# Altium PCB PCB_Quectel_M25.PcbDoc (part 1 of 2)
Units mm, origin at the board's own origin, x right, y up, seen from the top; angles counter-clockwise.
Board outline 88.9 x 63.5 mm, 2 copper layers (Top Layer, Bottom Layer), stack 1.67 mm thick; 94 components, 52 nets, 369 pads, 65 vias.
Unrouted connection lines stored in the file: 1.
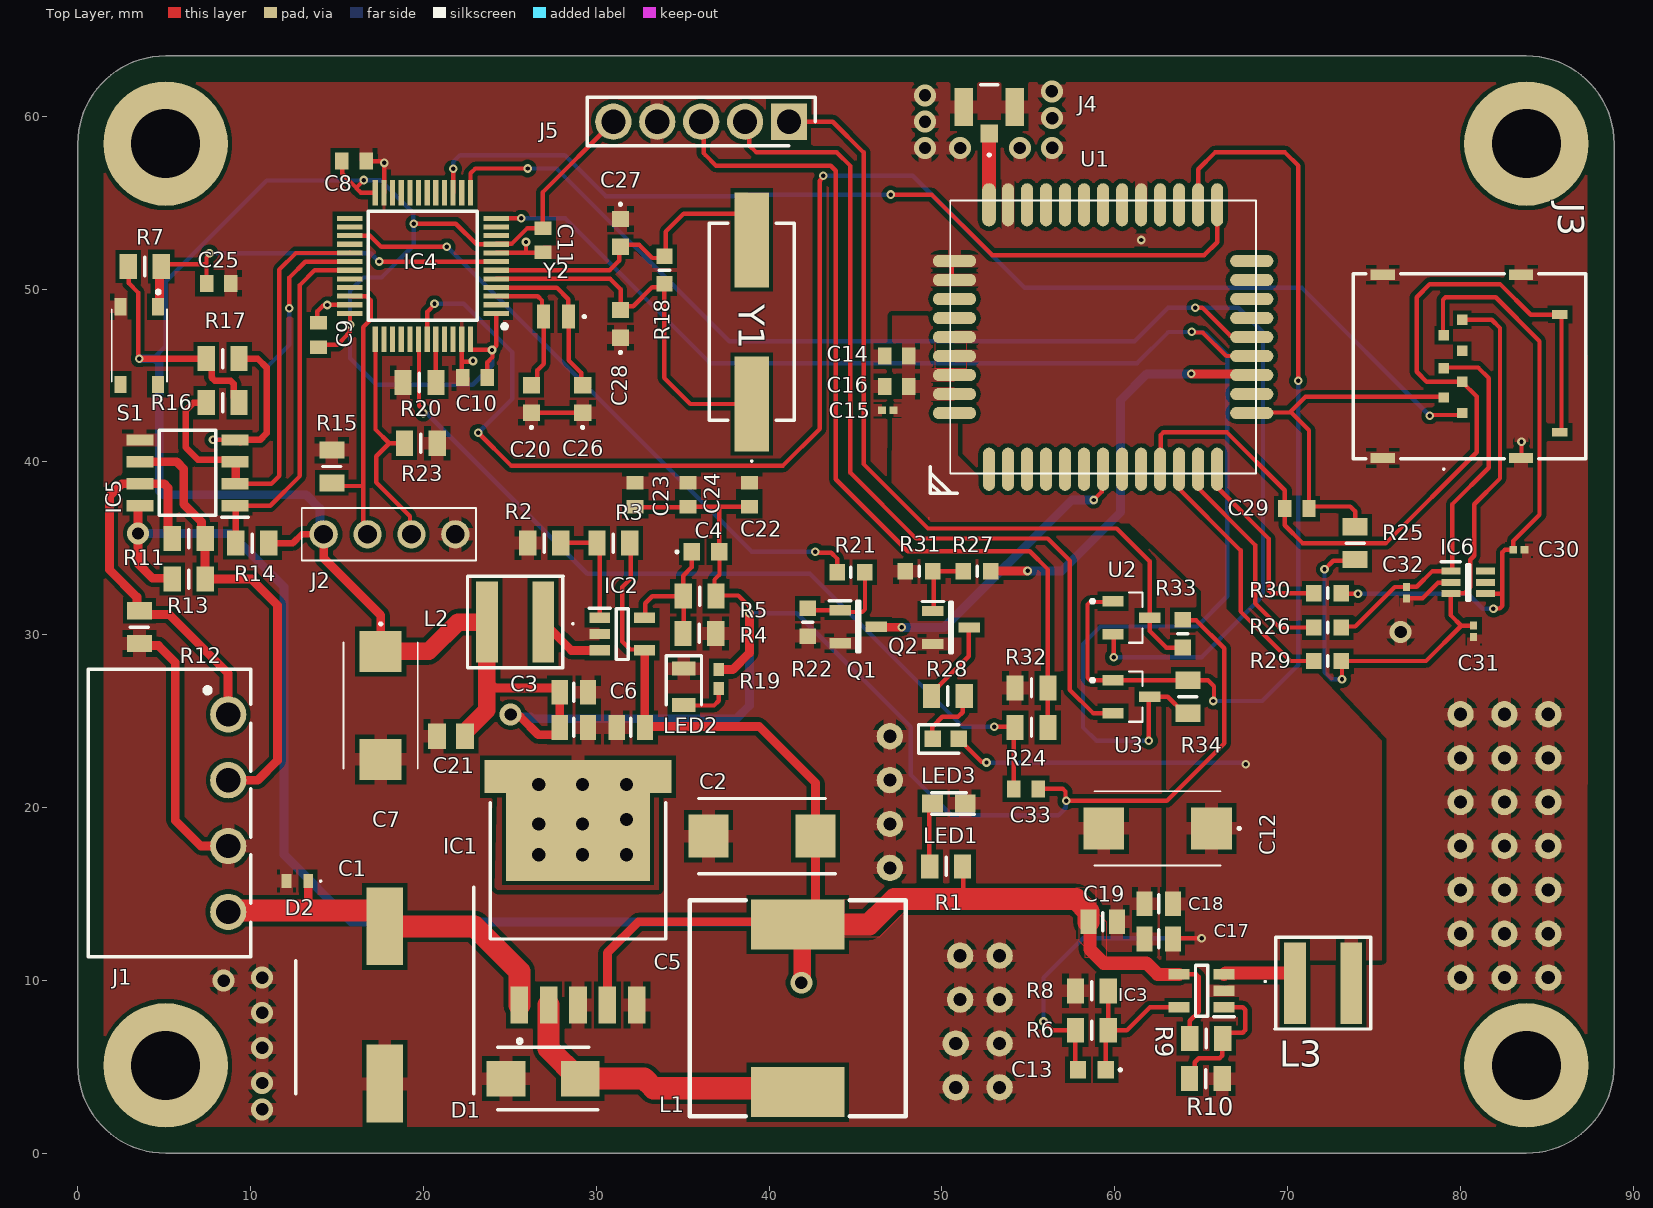
[diagram p0: Top Layer view]
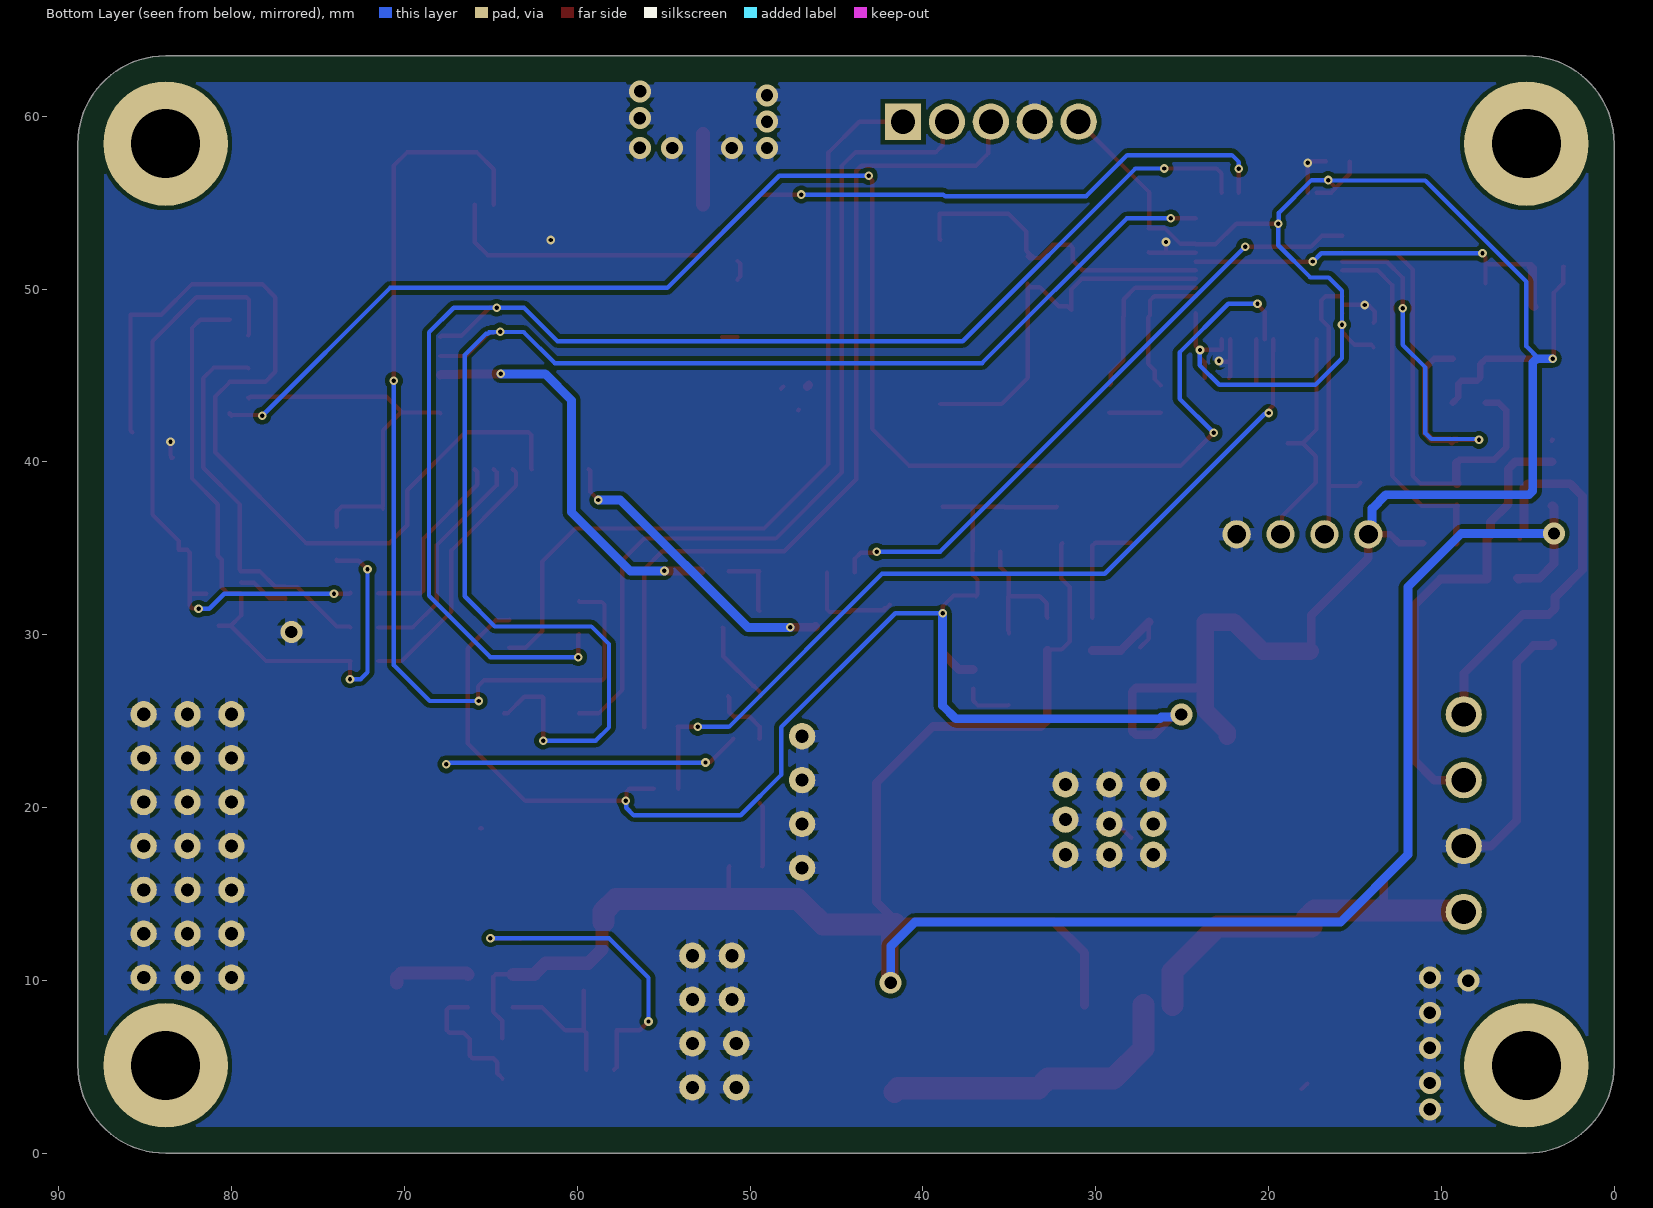
[diagram p1: Bottom Layer view, seen from below]
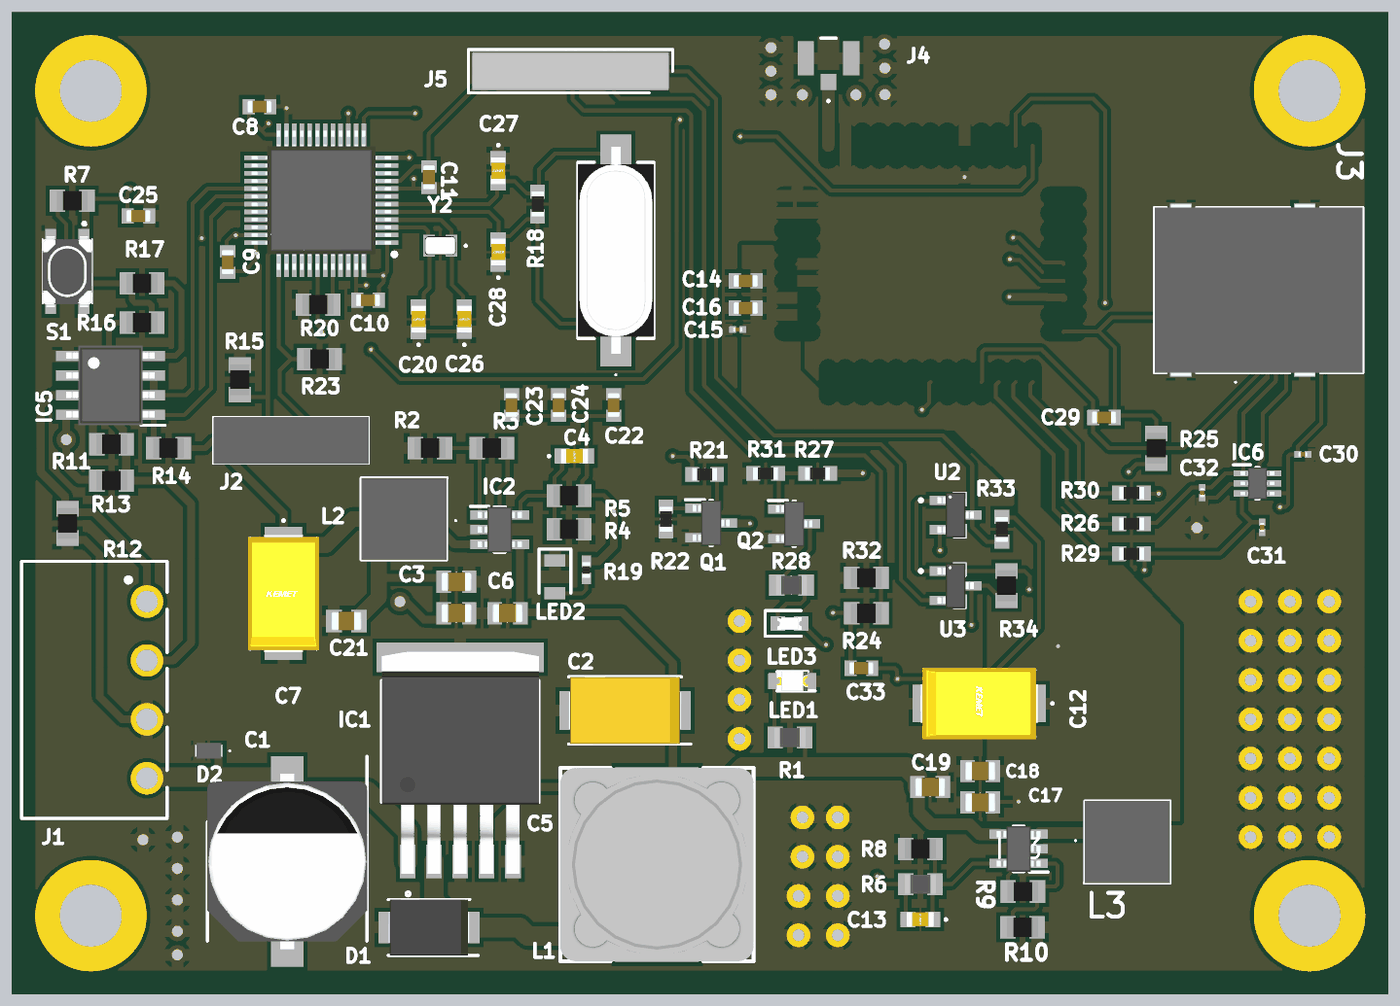
[diagram p2: 3D render of the assembled board from above, using the file's embedded part models]

## Layer stack, top to bottom
Top Solder: solder mask 0.0102, Solder Resist, Dk 3.5
Top Layer: signal copper 0.035
Dielectric 1: dielectric 1.6, FR-4, Dk 4
Bottom Layer: signal copper 0.035
Bottom Solder: solder mask 0.0102, Solder Resist, Dk 3.5

## Board outline
0,5.08 ccw(c5.08,5.08) 5.08,0 83.82,0 ccw(c83.82,5.08) 88.9,5.08 88.9,58.42 ccw(c83.82,58.42) 83.82,63.5 5.08,63.5 ccw(c5.08,58.42) 0,58.42

## Design rules (kind name [scope] priority, off if disabled: settings)
Clearance Clearance_1 [All] p1: gap=0.254 ignorepadtopadclearanceinfootprint=FALSE except(0: Arc-Hole Track-Hole SMDPad-Hole THPad-Hole Via-Hole Fill-Hole Poly-Hole Region-Hole Text-Hole)
Clearance [All] p2: gap=0.254 ignorepadtopadclearanceinfootprint=FALSE except(0: Arc-Hole Track-Hole SMDPad-Hole THPad-Hole Via-Hole Fill-Hole Poly-Hole Region-Hole Text-Hole)
PolygonConnect [All] p1: connectstyle=Relief reliefconductorwidth=0.762 reliefentries=4 polygonreliefangle="90 Angle" airgapwidth=0.254
RoutingVias RoutingVias_1 [IsVia] p1: holewidth=0.2 width=0.5 viastyle="Through Hole" minholewidth=0.254 minwidth=0.5 maxholewidth=0.762 maxwidth=1.27
RoutingVias [IsVia] p2 off: holewidth=0.381 width=0.635 viastyle="Through Hole" minholewidth=0.254 minwidth=0.254 maxholewidth=0.762 maxwidth=1.524
SolderMaskExpansion SolderMaskExpansion_1 [IsVia] p1: expansion=0.102 istentingtop=TRUE
SolderMaskExpansion [IsVia] p2: expansion=0.102 istentingtop=TRUE
Width [All] p1: maxlimit=5.08 minlimit=0.254 preferedwidth=0.254
30 further rules are at their usual default settings.

## Classes and differential pairs
component class Sheet2: R33 R34 U2 U3
component class Sheet3: C29 C30 C31 C32 IC6 J3 J4 LED3 Q1 Q2 R21 R22 R25 R26 R27 R28 R29 R30 R31 U1
component class Sheet1: C20 C26 C27 C28 C33 IC4 IC5 J2 J5 R11 R12 R13 R14 R15 R16 R17 R18 R20 R23 R24 R32 Y2
component class Schematic: C1 C2 C3 C4 C5 C6 C7 C8 C9 C10 C11 C12 C13 C14 C15 C16 C17 C18 C19 C21 C22 C23 C24 C25 D1 D2 IC1 IC2 IC3 J1 L1 L2 L3 LED1 LED2 R1 R2 R3 R4 R5 R6 R7 R8 R9 R10 R19 S1

## Components (designator, comment, footprint, x,y, rotation, side; value= is the part's Value field where it differs from the comment)
C1 "B40900B5477M000" CAPAE1030X1280N 17.767,8.578 r270 top
C2 "220uf" CAPPM7344X310N 39.592,18.35 r180 top
C3 "22uf" CAPC2012X140N 28.702,26.67 r180 top
C4 "47pF" C0603 36.322,34.798 r0 top
C5 "22uf" CAPC2012X140N 28.702,24.638 r180 top
C6 "22uf" CAPC2012X140N 32.004,24.638 r0 top
C7 "470uf" T495D 17.526,25.908 r270 top
C8 "100nf" CAPC1608X90N 15.977,57.404 r180 top
C9 "100nf" CAPC1608X90N 13.924,47.344 r270 top
C10 "100nf" CAPC1608X90N 22.987,44.882 r0 top
C11 "100nf" CAPC1608X90N 26.924,52.832 r90 top
C12 "470uf" T495D 62.484,18.796 r180 top
C13 "47pF" C0603 58.674,4.826 r180 top
C14 "100nf" CAPC1608X90N 47.387,46.129 r0 top
C15 "33pF" CAPC0603X33N 46.876,42.986 r0 top
C16 "10pF" CAPC1608X90N 47.387,44.368 r0 top
C17 "22uf" CAPC2012X140N 62.546,12.4 r0 top
C18 "22uf" CAPC2012X140N 62.546,14.432 r0 top
C19 "22uf" CAPC2012X140N 59.305,13.387 r180 top
C20 "20pF" C0603 26.247,43.649 r90 top
C21 "4.7uf" CAPC2012X152N 21.59,24.13 r0 top
C22 "100nf" CAPC1608X90N 38.862,38.1 r270 top
C23 "100nf" CAPC1608X90N 32.251,38.1 r270 top
C24 "1uF" CAPC1608X90N 35.306,38.1 r270 top
C25 "1uF" CAPC1608X90N 8.147,50.33 r180 top
C26 "20pF" C0603 31.401,47.991 r90 top
C27 "20pF" C0603 31.401,53.26 r270 top
C28 "20pF" C0603 29.21,43.65 r90 top
C29 "100nF" CAPC1608X90N 70.541,37.302 r0 top
C30 "33pF" CAPC0603X33N 83.389,34.912 r180 top
C31 "33pF" CAPC0603X33N 80.762,30.193 r90 top
C32 "33pF" CAPC0603X33N 76.886,32.436 r90 top
C33 "100nF" CAPC1608X90N 54.864,21.082 r0 top
D1 "SS54B" DIOM5336X244N 26.924,4.318 r180 top
D2 "ESDA17P50-1U1M" ESDA17P501U1M 12.7,15.748 r180 top
IC1 "LM2596S-5.0" KTT0005B 28.945,21.036 r270 top
IC2 "SY8089A" SOT95P285X140-5N 31.496,30.043 r0 top
IC3 "SY8089A" SOT95P285X140-5N 65.024,9.398 r180 top
IC4 "STM32F103C8T6XXX" QFP50P900X900X160-48N 19.964,51.345 r180 top
IC5 "MAX485CSA" SOIC127P600X175-8N 6.348,39.372 r180 top
IC6 "SP3002-04JTG" SOT65P220X110-6N 80.454,33.033 r0 top
J1 "691322310004" 691322310004 8.704,19.679 r270 top
J2 "SWD" 9298340704 21.844,35.814 r180 top
J3 "NSIM-3-C" NSIM3C 80.535,45.532 r270 top
J4 "U.FL-R-SMT-1_40_" UFLRSMT140 52.738,60.414 r0 top
J5 "826926-5" HDRV5W85P0X254_1X5_1270X250X950P 41.148,59.69 r180 top
L1 "SRR1260-330M" SRR1260-150M 41.656,8.382 r90 top
L2 "2.2uh" MPLAL50302R2 25.299,30.734 r180 top
L3 "2.2uh" MPLAL50302R2 72.055,9.837 r0 top
LED1 "150080GS75000" LEDM2012X80N 50.4,20.243 r180 top
LED2 "SP" LEDC2012X110N 35.062,26.989 r270 top
LED3 "" LEDC1608X80N 50.22,23.975 r0 top
Q1 "MMBT100" SOT96P237X111-3N 45.159,30.473 r0 top
Q2 "MMBT100" SOT96P237X111-3N 50.525,30.421 r0 top
R1 "150R" RESC2012X65N 50.245,16.596 r0 top
R2 "100k" RESC2012X60N 26.99,35.306 r0 top
R3 "100k" RESC2012X60N 30.988,35.306 r0 top
R4 "100k" RESC2012X60N 35.971,30.078 r180 top
R5 "453k" RESC2012X60N 35.978,32.236 r0 top
R6 "560k" RESC2012X65N 58.674,7.112 r180 top
R7 "CR0805-FX-1002ELF" RESC2012X60N 3.875,51.308 r180 top
R8 "100k" RESC2012X60N 58.674,9.398 r0 top
R9 "100k" RESC2012X60N 65.296,6.638 r180 top
R10 "100k" RESC2012X60N 65.278,4.318 r180 top
R11 "120R" RESC2012X60N 6.416,35.56 r0 top
R12 "20k" RESC2012X60N 3.565,30.445 r90 top
R13 "20k" RESC2012X60N 6.416,33.222 r180 top
R14 "10k" RESC2012X60N 10.094,35.306 r0 top
R15 "10k" RESC2012X60N 14.698,39.738 r270 top
R16 "10k" RESC2012X60N 8.382,43.434 r0 top
R17 "10k" RESC2012X60N 8.382,45.974 r180 top
R18 "1M" RESC1608X55N 33.947,51.1 r270 top
R19 "1k" RESC1005X40N 37.084,27.432 r90 top
R20 "10k" RESC2012X60N 19.769,44.599 r0 top
R21 "4K7" RESC1608X55N 44.734,33.614 r0 top
R22 "47K" RESC1608X55N 42.235,30.725 r90 top
R23 "10k" RESC2012X60N 19.85,41.081 r180 top
R24 "10k" RESC2012X60N 55.184,24.638 r0 top
R25 "10K" RESC2012X60N 73.914,35.306 r90 top
R26 "22R" RESC1608X55N 72.32,30.421 r0 top
R27 "4K7" RESC1608X55N 52.037,33.674 r180 top
R28 "1K" RESC2012X65N 50.346,26.455 r0 top
R29 "22R" RESC1608X55N 72.32,28.484 r0 top
R30 "22R" RESC1608X55N 72.32,32.408 r0 top
R31 "47K" RESC1608X55N 48.677,33.674 r0 top
R32 "100k" RESC2012X60N 55.184,26.924 r0 top
R33 "4.7K" RESC1608X55N 63.936,30.062 r90 top
R34 "10k" RESC2012X60N 64.237,26.416 r90 top
S1 "PTS815_SJK_250_SMTR_LFS" PTS815SJK250SMTRLFS 3.556,46.736 r270 top
U1 "M25" PCBComponent_1 1075.2,-893.461 r90 top
U2 "MMUN2233LT1" SOT95P237X111-3N 60.96,30.988 r0 top
U3 "MMUN2233LT1" SOT95P237X111-3N 60.96,26.416 r0 top
Y1 "8Mhz" 830003151 39,48.1 r90 top
Y2 "32.768kHz" ABS06 27.658,48.41 r180 top

## Footprints (in the part's own frame and the unit in brackets; to place one, negate y for a bottom-side part, rotate by r counter-clockwise, add the part's x,y. Pads: shape width x height; smd on the part's side, far side on the other; paste and mask are expansions set on the pad)
830003151 [mm]
  rect 5.5x2 smd: 1(-4.75,0) 2(4.75,0)
  silkscreen extent -8.1,-2.45 5.7,2.45, body extent -6.7,-2.45 6.7,2.45, height 4.3
9298340704 [mm]
  round 1.635 hole 1.09: 1(0,0) 2(2.54,0) 3(5.08,0) 4(7.62,0)
  silkscreen extent -1.2,-1.52 8.89,1.52, body extent -1.2,-1.52 8.82,1.52, height 8.81
691322310004 [mm]
  round 2.1 hole 1.4: 1(-5.715,0) 2(-1.905,0) 3(1.905,0) 4(5.715,0)
  silkscreen extent -8.31,-8.1 8.31,1.3
ABS06 [mm]
  rect 0.75x1.4 smd: 1(-0.725,0) 2(0.725,0)
  silkscreen extent -1.7,-0.05 -1.6,0.05, body extent -1,-0.6 1,0.6, height 0.6
C0603 [mm]
  rect 0.95x1 smd: 1(-0.8,0) 2(0.8,0)
  silkscreen extent -1.7,-0.05 -1.6,0.05, body extent -0.87,-0.48 0.88,0.47, height 0.87
CAPAE1030X1280N [mm]
  rect 4.5x2.1 smd: 1(-4.55,0) 2(4.55,0)
  silkscreen extent -6.8,-5.15 5.15,5.15, body extent -5.67,-5.18 5.67,5.18, height 12.67
CAPC0603X33N [mm]
  rect 0.46x0.42 smd: 1(-0.33,0) 2(0.33,0)
  body extent -0.3,-0.15 0.3,0.15, height 0.33
CAPC1608X90N [mm]
  rect 0.78x0.99 smd: 1(-0.7,0) 2(0.7,0)
  body extent -0.8,-0.41 0.8,0.41, height 0.9
CAPC2012X140N [mm]
  rect 0.94x1.43 smd: 1(-0.82,0) 2(0.82,0)
  silkscreen extent 0,-0.53 0,0.53, body extent -1,-0.63 1,0.63, height 1.4
CAPC2012X152N [mm]
  rect 1.02x1.47 smd: 1(-0.81,0) 2(0.81,0)
  body extent -1,-0.63 1,0.63, height 1.52
CAPPM7344X310N [mm]
  rect 2.3x2.5 smd: 1(-3.1,0) 2(3.1,0)
  silkscreen extent -4.25,-2.17 3.65,2.17, body extent -3.65,-2.17 3.65,2.17, height 3.1
DIOM5336X244N [mm]
  rect 2.25x2.05 smd: 1(-2.15,0) 2(2.15,0)
  silkscreen extent -3.18,-1.81 2.64,1.81, body extent -2.64,-1.81 2.64,1.81, height 2.44
ESDA17P501U1M [mm]
  rect 0.55x0.8 smd: 1(-0.625,0) 2(0.625,0)
  silkscreen extent -1.4,-0.05 -1.3,0.05, body extent -0.84,-0.5 0.84,0.5, height 0.7
HDRV5W85P0X254_1X5_1270X250X950P [mm]
  rect 2.1x2.1 hole 1.4: 1(0,0)
  round 2.1 hole 1.4: 2(2.54,0) 3(5.08,0) 4(7.62,0) 5(10.16,0)
  silkscreen extent -1.52,-1.4 11.68,1.4, body extent -1.27,-1.25 11.43,1.25, height 9.5
KTT0005B [mm]
  rect 2.16x1.02 smd: 1(12.461,-3.4) 2(12.461,-1.7) 3(12.461,0) 4(12.461,1.7) 5(12.461,3.4)
  rect 6.99x8.33 smd: 6(1.786,0)
  rect 1.91x1.235 smd: 7(-0.754,4.782) 8(-0.754,-4.782)
  silkscreen extent 0.76,-5.08 14.68,5.08, body extent -1.11,-5.08 13.24,5.08, height 4.72
LEDC1608X80N [mm]
  rect 0.95x0.95 smd: 1(-0.75,0) 2(0.75,0)
  silkscreen extent -1.58,-0.82 0.75,0.82, body extent -0.8,-0.4 0.8,0.4, height 0.7
LEDC2012X110N [mm]
  rect 0.8x1.35 smd: 1(-1.05,0) 2(1.05,0)
  silkscreen extent -1.8,-1.02 1.05,1.02
LEDM2012X80N [mm]
  rect 1.2x1.05 smd: 1(-0.95,0) 2(0.95,0)
  silkscreen extent -1.48,-0.63 1,0.63, body extent -1,-0.63 1,0.63, height 0.7
MPLAL50302R2 [mm]
  rect 1.25x4.7 smd: 1(-1.625,0) 2(1.625,0)
  silkscreen extent -3.4,-2.65 2.75,2.65, body extent -2.75,-2.65 2.75,2.65, height 3.2
NSIM3C [mm]
  rect 0.6x0.6 smd: C1(1.8,-1.495) C2(0.11,-1.495) C3(-1.8,-1.495) C5(0.9,-0.435) C6(-0.9,-0.435) C7(-2.7,-0.435) CD1(2.7,-0.435)
  rect 0.5x0.9 smd: G1(3.81,5.225) G2(-3,5.225)
  rect 0.6x1.4 smd: MP1(5.3,-5.025) MP2(-5.3,-5.025) MP3(5.3,2.975) MP4(-5.3,2.975)
  silkscreen extent -5.35,-6.73 6,6.73, body extent -5.54,-6.73 5.54,6.73, height 1.7
PCBComponent_1 [mm]
  oval 2.5x0.7 smd mask+0.05: 1(933.039,1022.473) 2(933.039,1021.373) 3(933.039,1020.273) 4(933.039,1019.173) 5(933.039,1018.073) 6(933.039,1016.973) 7(933.039,1015.873) 8(933.039,1014.773) 9(933.039,1013.673) 10(933.039,1012.573) 11(933.039,1011.473) 12(933.039,1010.373) 13(933.039,1009.273) 23(948.339,1009.273) 24(948.339,1010.373) 25(948.339,1011.473) 26(948.339,1012.573) 27(948.339,1013.673) 28(948.339,1014.773) 29(948.339,1015.873) 30(948.339,1016.973) 31(948.339,1018.073) 32(948.339,1019.173) 33(948.339,1020.273) 34(948.339,1021.373)
  oval 0.7x2.5 smd mask+0.05: 14(936.289,1007.273) 15(937.389,1007.273) 16(938.489,1007.273) 17(939.589,1007.273) 18(940.689,1007.273) 19(941.789,1007.273) 20(942.889,1007.273) 21(943.989,1007.273) 22(945.089,1007.273) 36(945.089,1024.473) 37(943.989,1024.473) 38(942.889,1024.473) 39(941.789,1024.473) 40(940.689,1024.473) 41(939.589,1024.473) 42(938.489,1024.473) 43(937.389,1024.473) 44(936.289,1024.473)
  oval 2.5x0.8 smd mask+0.05: 35(948.339,1022.473)
  silkscreen extent 931.64,1007.02 948.59,1025.87
PTS815SJK250SMTRLFS [mm]
  rect 1x0.7 smd: 1(-2.25,1.075) 2(2.25,1.075) 3(-2.25,-1.075) 4(2.25,-1.075)
  silkscreen extent -3.2,-1.6 2.07,1.6, body extent -2.3,-1.6 2.3,1.6, height 2.5
QFP50P900X900X160-48N [mm]
  rect 1.475x0.3 smd: 1(-4.238,2.75) 2(-4.238,2.25) 3(-4.238,1.75) 4(-4.238,1.25) 5(-4.238,0.75) 6(-4.238,0.25) 7(-4.238,-0.25) 8(-4.238,-0.75) 9(-4.238,-1.25) 10(-4.238,-1.75) 11(-4.238,-2.25) 12(-4.238,-2.75) 25(4.238,-2.75) 26(4.238,-2.25) 27(4.238,-1.75) 28(4.238,-1.25) 29(4.238,-0.75) 30(4.238,-0.25) 31(4.238,0.25) 32(4.238,0.75) 33(4.238,1.25) 34(4.238,1.75) 35(4.238,2.25) 36(4.238,2.75)
  rect 0.3x1.475 smd: 13(-2.75,-4.238) 14(-2.25,-4.238) 15(-1.75,-4.238) 16(-1.25,-4.238) 17(-0.75,-4.238) 18(-0.25,-4.238) 19(0.25,-4.238) 20(0.75,-4.238) 21(1.25,-4.238) 22(1.75,-4.238) 23(2.25,-4.238) 24(2.75,-4.238) 37(2.75,4.238) 38(2.25,4.238) 39(1.75,4.238) 40(1.25,4.238) 41(0.75,4.238) 42(0.25,4.238) 43(-0.25,4.238) 44(-0.75,4.238) 45(-1.25,4.238) 46(-1.75,4.238) 47(-2.25,4.238) 48(-2.75,4.238)
  silkscreen extent -4.85,-3.15 3.15,3.62, body extent -4.5,-4.5 4.5,4.5, height 1.6
RESC1005X40N [mm]
  rect 0.75x0.6 smd: 1(-0.55,0) 2(0.55,0)
  body extent -0.5,-0.25 0.5,0.25, height 0.4
RESC1608X55N [mm]
  rect 0.9x0.95 smd: 1(-0.8,0) 2(0.8,0)
  silkscreen extent 0,-0.3 0,0.3, body extent -0.8,-0.4 0.8,0.4, height 0.55
RESC2012X60N [mm]
  rect 1x1.45 smd: 1(-0.95,0) 2(0.95,0)
  silkscreen extent 0,-0.53 0,0.53, body extent -1,-0.63 1,0.63, height 0.5
RESC2012X65N [mm]
  rect 1x1.4 smd: 1(-0.95,0) 2(0.95,0)
  silkscreen extent 0,-0.53 0,0.53, body extent -1,-0.63 1,0.62, height 0.5
SOIC127P600X175-8N [mm]
  rect 1.55x0.65 smd: 1(-2.75,1.905) 2(-2.75,0.635) 3(-2.75,-0.635) 4(-2.75,-1.905) 5(2.75,-1.905) 6(2.75,-0.635) 7(2.75,0.635) 8(2.75,1.905)
  silkscreen extent -3.52,-2.46 1.63,2.58, body extent -2.86,-2.57 2.86,2.57, height 1.66
SOT65P220X110-6N [mm]
  rect 1.1x0.4 smd: 1(-1,0.65) 2(-1,0) 3(-1,-0.65) 4(1,-0.65) 5(1,0) 6(1,0.65)
  silkscreen extent -1.55,-1.02 0.1,1.2, body extent -1.1,-1.02 1.1,1.02, height 1.1
SOT95P237X111-3N [mm]
  rect 1.23x0.6 smd: 1(-1.06,0.95) 2(-1.06,-0.95) 3(1.06,0)
  silkscreen extent -2.35,-1.45 0.65,1.45, body extent -1.18,-1.46 1.18,1.46, height 1.11
SOT95P285X140-5N [mm]
  rect 1.2x0.6 smd: 1(-1.3,0.95) 2(-1.3,0) 3(-1.3,-0.95) 4(1.3,-0.95) 5(1.3,0.95)
  silkscreen extent -1.9,-1.48 0.35,1.5, body extent -1.43,-1.48 1.43,1.48, height 1.4
SOT96P237X111-3N [mm]
  rect 1.25x0.6 smd: 1(-1.05,0.955) 2(-1.05,-0.955) 3(1.05,0)
  silkscreen extent -1.68,-1.46 0.08,1.51, body extent -1.18,-1.46 1.18,1.46, height 1.11
SRR1260-150M [mm]
  rect 2.9x5.4 smd: 1(-4.85,0) 2(4.85,0)
  silkscreen extent -6.25,-6.25 6.25,6.25, body extent -6.25,-6.25 6.25,6.25, height 6
T495D [mm]
  rect 2.37x2.43 smd: 1(-3.12,0) 2(3.12,0)
  silkscreen extent -4.77,-2.15 3.65,2.15, body extent -3.8,-2.3 3.8,2.3, height 3.11
UFLRSMT140 [mm]
  rect 1x1.05 smd: 1(0,-1.413)
  rect 1.05x2.2 smd: 2(1.475,0.112) 3(-1.475,0.112)
  silkscreen extent -0.5,-2.7 0.5,1.41

## Part data
C1: "Capacitor Polarised", Manufacturer_Name=TDK, Mouser Part Number=871-B40900B5477M000, Datasheet Link=https://product.tdk.com/system/files/dam/doc/product/capacitor/aluminum-electrolytic/hybrid-polymer/data_sheet/20/30/db/aec/b40900.pdf, Height=12.8mm, Manufacturer_Part_Number=B40900B5477M000, Mouser Price/Stock=https://www.mouser.co.uk/ProductDetail/EPCOS-TDK/B40900B5477M000?qs=sPbYRqrBIVkjJ1xmSzm%2FSw%3D%3D
C2: library part TAJD227K010RNJ, "Capacitor Polarised 220uf 10v smd tantalum Part Number: TAJD227K010RNJ", Manufacturer_Name=AVX, Mouser Part Number=581-TAJD227K010R, Arrow Part Number=TAJD227K010RNJ, Arrow Price/Stock=https://www.arrow.com/en/products/tajd227k010rnj/avx, Datasheet Link=http://datasheets.avx.com/TAJ.pdf, Height=3.1mm, Manufacturer_Part_Number=TAJD227K010RNJ, Mouser Price/Stock=https://www.mouser.co.uk/ProductDetail/AVX/TAJD227K010RNJ?qs=min0%252Bk%2FlUAadDEgYeVIB%252Bw%3D%3D
C3 C5 C6 C17 C18 C19: library part CL21X226MQQNNNE, "Capacitor", Manufacturer_Name=SAMSUNG, Mouser Part Number=N/A, Arrow Part Number=CL21X226MQQNNNE, Arrow Price/Stock=https://www.arrow.com/en/products/cl21x226mqqnnne/samsung-electro-mechanics, Datasheet Link=https://product.samsungsem.com/part/download.do, Height=1.4mm, Manufacturer_Part_Number=CL21X226MQQNNNE, Mouser Price/Stock=https://www.mouser.com/Search/Refine.aspx?Keyword=N%2FA
C4 C13: library part C0603H470J5GACTU, "Capacitor Part Number: C0603H470J5GACTU 47pf 50v 0603", Manufacturer_Name=KEMET, Mouser Part Number=80-C0603H470J5GACTU, Datasheet Link=https://content.kemet.com/datasheets/KEM_C1001_C0G_200C_SMD.pdf, Height=0.87mm, Manufacturer_Part_Number=C0603H470J5GACTU, Mouser Price/Stock=https://www.mouser.co.uk/ProductDetail/KEMET/C0603H470J5GACTU?qs=OlC7AqGiEDlBSvW2T4T4RQ%3D%3D
C7 C12: library part T495D477K006ATE100, "Capacitor Polarised", Manufacturer_Name=KEMET, Mouser Part Number=80-T495D477K006E100, Arrow Part Number=T495D477K006ATE100, Arrow Price/Stock=https://www.arrow.com/en/products/t495d477k006ate100/kemet-corporation?region=nac, Datasheet Link=https://content.kemet.com/datasheets/KEM_T2009_T495.pdf, Height=3.1mm, Manufacturer_Part_Number=T495D477K006ATE100, Mouser Price/Stock=https://www.mouser.co.uk/ProductDetail/KEMET/T495D477K006ATE100?qs=JMiwNnuXh3pQ954ydQHvqQ%3D%3D
C8 C9 C10 C11 C14 C22 C23 C29 C33: library part 06036C104MAZ2A, "Capacitor", Manufacturer_Name=AVX, Mouser Part Number=581-06036C104MAZ2A, Arrow Part Number=06036C104MAZ2A, Arrow Price/Stock=https://www.arrow.com/en/products/06036c104maz2a/avx, Datasheet Link=https://componentsearchengine.com/Datasheets/1/06031A100FAT2A.pdf, Height=0.9mm, Manufacturer_Part_Number=06036C104MAZ2A, Mouser Price/Stock=https://www.mouser.co.uk/ProductDetail/AVX/06036C104MAZ2A?qs=9g9l2Gjnh0s%2FYval7p6%252B1g%3D%3D
C15 C30 C31 C32: library part GJM0335C0J330JB01D, "Capacitor", Manufacturer_Name="Murata Electronics", Mouser Part Number=81-GJM0335C0J330JB1D, Arrow Part Number=GJM0335C0J330JB01D, Arrow Price/Stock=https://www.arrow.com/en/products/gjm0335c0j330jb01d/murata-manufacturing, Datasheet Link=https://datasheet.datasheetarchive.com/originals/distributors/Datasheets_SAMA/1b8ebccddda42a85d5d2941bb85cddb2.pdf, Height=0.33mm, Manufacturer_Part_Number=GJM0335C0J330JB01D, Mouser Price/Stock=https://www.mouser.co.uk/ProductDetail/Murata-Electronics/GJM0335C0J330JB01D?qs=563MOeNa05KY2adUKCPfEg%3D%3D
C16: library part CC0603JRNPO9BN100, "Capacitor", Manufacturer_Name=KEMET, Mouser Part Number=603-C0603JRNPO9BN100, Arrow Part Number=CC0603JRNPO9BN100, Arrow Price/Stock=https://www.arrow.com/en/products/cc0603jrnpo9bn100/yageo, Manufacturer_Part_Number=CC0603JRNPO9BN100, Mouser Price/Stock=https://www.mouser.co.uk/ProductDetail/Yageo/CC0603JRNPO9BN100?qs=vTakOoo5QyIFwFOmdMrXhw%3D%3D
C20 C26 C27 C28: library part C0603C200G8HACTU, "Capacitor", Manufacturer_Name=KEMET, Mouser Part Number=80-C0603C200G8HACTU, Datasheet Link=https://content.kemet.com/datasheets/KEM_C1007_X8R_ULTRA_150C_SMD.pdf, Height=0.87mm, Manufacturer_Part_Number=C0603C200G8HACTU, Mouser Price/Stock=https://www.mouser.co.uk/ProductDetail/KEMET/C0603C200G8HACTU?qs=W0yvOO0ixfFF9ypbpYI35Q%3D%3D
C21: library part 08056D475MAT2A, "Capacitor", Manufacturer_Name=AVX, Mouser Part Number=581-08056D475M, Datasheet Link=https://spicat.kyocera-avx.com/product/mlcc/chartview/08056D475MAT2A/DataSheet/X5R, Height=1.52mm, Manufacturer_Part_Number=08056D475MAT2A, Mouser Price/Stock=https://www.mouser.com/Search/Refine.aspx?Keyword=581-08056D475M
C24 C25: library part 06036C105MAT2A, "Capacitor", Manufacturer_Name=AVX, Mouser Part Number=581-06036C105MAT2A, Arrow Part Number=06036C105MAT2A, Arrow Price/Stock=https://www.arrow.com/en/products/06036c105mat2a/avx, Datasheet Link=https://componentsearchengine.com/Datasheets/1/06031A100FAT2A.pdf, Height=0.9mm, Manufacturer_Part_Number=06036C105MAT2A, Mouser Price/Stock=https://www.mouser.co.uk/ProductDetail/AVX/06036C105MAT2A?qs=1X9trZCrWl0x0jW7AUsrpw%3D%3D
D1: "Diode", Manufacturer_Name="HY Electronic", Datasheet Link=https://datasheet.datasheetarchive.com/originals/distributors/Datasheets-3/DSA-43270.pdf, Height=2.44mm, Manufacturer_Part_Number=SS54B
D2: "TVS Diode (Uni-directional)", Manufacturer_Name=STMicroelectronics, Mouser Part Number=511-ESDA17P50-1U1M, Arrow Part Number=ESDA17P50-1U1M, Arrow Price/Stock=https://www.arrow.com/en/products/esda17p50-1u1m/stmicroelectronics?region=nac, Datasheet Link=http://www.st.com/content/ccc/resource/technical/document/datasheet/group3/21/d7/38/9c/80/7e/49/d0/DM00304840/files/DM00304840.pdf/jcr:content/translations/en.DM00304840.pdf, Height=0.6mm, Manufacturer_Part_Number=ESDA17P50-1U1M, Mouser Price/Stock=https://www.mouser.co.uk/ProductDetail/STMicroelectronics/ESDA17P50-1U1M?qs=aVyJF2WnouQ6X0XKPX5Sbg%3D%3D
IC1: "Integrated Circuit", Manufacturer_Name="Texas Instruments", Mouser Part Number=926-LM2596S-50, Arrow Part Number=LM2596S-5.0, Arrow Price/Stock=https://www.arrow.com/en/products/lm2596s-5.0/texas-instruments?region=nac, Datasheet Link=https://www.ti.com/lit/gpn/LM2596, Manufacturer_Part_Number=LM2596S-5.0, Mouser Price/Stock=https://www.mouser.co.uk/ProductDetail/Texas-Instruments/LM2596S-5.0?qs=X1J7HmVL2ZGcOr96VNr%252B%2Fw%3D%3D
IC2 IC3: "Integrated Circuit", Manufacturer_Name=Silergy, Datasheet Link=https://datasheet.lcsc.com/szlcsc/SY8089AAAC_C78988.pdf, Height=1.4mm, Manufacturer_Part_Number=SY8089A
IC4: "Integrated Circuit", Manufacturer_Name=ST, Height=1.6mm, Manufacturer_Part_Number=STM32F103C8T6XXX
IC5: "Integrated Circuit", Manufacturer_Name="Analog Devices", Mouser Part Number=N/A, Datasheet Link=https://datasheets.maximintegrated.com/en/ds/MAX1487-MAX491.pdf, Height=1.75mm, Manufacturer_Part_Number=MAX485CSA, Mouser Price/Stock=https://www.mouser.co.uk/ProductDetail/Maxim-Integrated/MAX485CSA?qs=LHmEVA8xxfbb%2FSUlm%252BHF3Q%3D%3D
IC6: "Integrated Circuit", Manufacturer_Name=LITTELFUSE, Mouser Part Number=576-SP3002-04JTG, Arrow Part Number=SP3002-04JTG, Arrow Price/Stock=https://www.arrow.com/en/products/sp3002-04jtg/littelfuse?region=nac, Datasheet Link=https://m.littelfuse.com/~/media/electronics/datasheets/tvs_diode_arrays/littelfuse_tvs_diode_array_sp3002_datasheet.pdf.pdf, Height=1.1mm, Manufacturer_Part_Number=SP3002-04JTG, Mouser Price/Stock=https://www.mouser.co.uk/ProductDetail/Littelfuse/SP3002-04JTG?qs=Xb8IjHhkxj40Q3K%2Fx81Vbw%3D%3D
J1: "4 Position Terminal Block Header, Male Pins, Shrouded (4 Side) 0.150 (3.81mm) 90Â°, Right Angle Through Hole", Package=None, Check_prices=https://www.snapeda.com/parts/691322310004/Wurth+Electronics+Inc./view-part/?ref=eda, MF="Wurth Electronics", MP=691322310004, SnapEDA_Link=https://www.snapeda.com/parts/691322310004/Wurth+Electronics+Inc./view-part/?ref=snap
J2: library part 929834-07-04, "Connector", Manufacturer_Name=3M, Mouser Part Number=517-929834-07-04, Datasheet Link=https://www.mouser.ca/datasheet/2/1/ts0769-35914.pdf, Height=8.713mm, Manufacturer_Part_Number=929834-07-04, Mouser Price/Stock=https://www.mouser.com/Search/Refine.aspx?Keyword=517-929834-07-04
J3: "Connector", Manufacturer_Name="CUI Devices", Mouser Part Number=179-NSIM-3-C, Datasheet Link=https://www.cuidevices.com/product/resource/pdf/nsim-3-c.pdf, Height=1.6mm, Manufacturer_Part_Number=NSIM-3-C, Mouser Price/Stock=https://www.mouser.co.uk/ProductDetail/CUI-Devices/NSIM-3-C?qs=Z%252BL2brAPG1Ij16zaFFJpag%3D%3D
J4: "RF Connectors / Coaxial Connectors SMT MALE RECEPT AU 50 OHM", Manufacturer_Name=Hirose, Manufacturer_Part_Number=U.FL-R-SMT-1(40), Mouser Part Number=798-UFLRSMT140, Datasheet Link=https://www.arrow.com/en/products/u.fl-r-smt-1-40/hirose-electric, Geometry.Height=1.45mm, Mouser Price/Stock=https://www.mouser.co.uk/ProductDetail/Hirose-Connector/U.FL-R-SMT-140?qs=PABxe4V6HDrVNWAmh6WKgw%3D%3D
J5: "Connector", Manufacturer_Name="TE Connectivity", Mouser Part Number=571-826926-5, Arrow Part Number=826926-5, Arrow Price/Stock=https://www.arrow.com/en/products/826926-5/te-connectivity?region=europe, Datasheet Link=http://uk.rs-online.com/web/p/products/6695323, Height=9.5mm, Manufacturer_Part_Number=826926-5, Mouser Price/Stock=https://www.mouser.co.uk/ProductDetail/TE-Connectivity/826926-5?qs=wMzmFFBcbXS4DfsolxXR2g%3D%3D
L1: "Inductor 33uH", Manufacturer_Name=Bourns, Mouser Part Number=652-SRR1260-330M, Arrow Part Number=SRR1260-330M, Arrow Price/Stock=https://www.arrow.com/en/products/srr1260-330m/bourns?region=nac, Datasheet Link=https://www.bourns.com/docs/Product-Datasheets/SRR1260.pdf, Manufacturer_Part_Number=SRR1260-330M, Mouser Price/Stock=https://www.mouser.co.uk/ProductDetail/Bourns/SRR1260-330M?qs=R2jSSvul3fC3V4%252BTrq0P0w%3D%3D
L2 L3: library part MPL-AL5030-2R2, "Inductor Part Number :MPL-AL5030-2R2", Manufacturer_Name="Monolithic Power Systems (MPS)", Mouser Part Number=946-MPL-AL5030-2R2, Datasheet Link=https://www.monolithicpower.com/en/documentview/productdocument/index/version/2/document_type/Datasheet/lang/en/sku/MPL-AL5030-2R2/document_id/5804, Height=3.1mm, Manufacturer_Part_Number=MPL-AL5030-2R2, Mouser Price/Stock=https://www.mouser.co.uk/ProductDetail/Monolithic-Power-Systems-MPS/MPL-AL5030-2R2?qs=sPbYRqrBIVnhOZ%2F5ltO9Lw%3D%3D
LED1: "LED", Manufacturer_Name="Wurth Elektronik", Mouser Part Number=710-150080GS75000, Datasheet Link=https://katalog.we-online.com/led/datasheet/150080GS75000.pdf, Height=0.8mm, Manufacturer_Part_Number=150080GS75000, Mouser Price/Stock=https://www.mouser.co.uk/ProductDetail/Wurth-Elektronik/150080GS75000?qs=2kOmHSv6VfQRoTEZVk1mGA%3D%3D
LED2: library part SM0805RC, "LED", Manufacturer_Name=Bivar, Mouser Part Number=749-SM0805RC, Datasheet Link=https://componentsearchengine.com/Datasheets/1/SM0805RC.pdf, Height=1.1mm, Manufacturer_Part_Number=SM0805RC, Mouser Price/Stock=https://www.mouser.co.uk/ProductDetail/Bivar/SM0805RC?qs=jaLxTFIJCivm3JSYe5gHjQ%3D%3D
LED3: library part 150060YS75000, "LED", Manufacturer_Name="Wurth Elektronik", Mouser Part Number=710-150060YS75000, Datasheet Link=http://uk.rs-online.com/web/p/products/8154219, Height=0.8mm, Manufacturer_Part_Number=150060YS75000, Mouser Price/Stock=https://www.mouser.co.uk/ProductDetail/Wurth-Elektronik/150060YS75000?qs=LlUlMxKIyB0nKmwefHgtZw%3D%3D
Q1 Q2: "Transistor BJT NPN", Manufacturer_Name=onsemi, Mouser Part Number=512-MMBT100, Arrow Part Number=MMBT100, Arrow Price/Stock=https://www.arrow.com/en/products/mmbt100/on-semiconductor?region=nac, Datasheet Link=https://www.onsemi.com/pub/Collateral/PN100A-D.pdf, Height=1.11mm, Manufacturer_Part_Number=MMBT100, Mouser Price/Stock=https://www.mouser.co.uk/ProductDetail/onsemi-Fairchild/MMBT100?qs=UMEuL5FsraBwiKQ1WMrjpg%3D%3D
R1: library part RMCF0805FT150R, "Resistor 0805 150R 1/4W", Manufacturer_Name="Stackpole Electronics", Mouser Part Number=708-RMCF0805FT150R, Arrow Part Number=RMCF0805FT150R, Arrow Price/Stock=https://www.arrow.com/en/products/rmcf0805ft150r/stackpole-electronics?region=nac, Datasheet Link=https://cs.seielect.com/catalog/SEI-RMCF_RMCP.pdf, Height=0.65mm, Manufacturer_Part_Number=RMCF0805FT150R, Mouser Price/Stock=https://www.mouser.co.uk/ProductDetail/SEI-Stackpole/RMCF0805FT150R?qs=FESYatJ8odKRN1MTHzs13Q%3D%3D
R2 R3 R4 R8 R9 R10 R32: library part CR0805-FX-1003ELF, "Resistor", Manufacturer_Name=Bourns, Mouser Part Number=652-CR0805FX-1003ELF, Arrow Part Number=CR0805-FX-1003ELF, Arrow Price/Stock=https://www.arrow.com/en/products/cr0805-fx-1003elf/bourns?region=nac, Datasheet Link=https://www.bourns.com/pdfs/chpreztr.pdf, Height=0.6mm, Manufacturer_Part_Number=CR0805-FX-1003ELF, Mouser Price/Stock=https://www.mouser.co.uk/ProductDetail/Bourns/CR0805-FX-1003ELF?qs=tknLyCMIRbPd3RvyRhvkuQ%3D%3D
R5: library part RK73H2ATTD4533F, "Resistor 453k 0805 1/4w", Manufacturer_Name="KOA Speer", Mouser Part Number=660-RK73H2ATTD4533F, Arrow Part Number=RK73H2ATTD4533F, Arrow Price/Stock=https://www.arrow.com/en/products/rk73h2attd4533f/koa-speer-electronics, Datasheet Link=http://www.koaspeer.com/catimages/Products/RK73H/RK73H.pdf, Height=0.6mm, Manufacturer_Part_Number=RK73H2ATTD4533F, Mouser Price/Stock=https://www.mouser.com/Search/Refine.aspx?Keyword=660-RK73H2ATTD4533F
R6: library part CPF0805B560KE, "Resistor", Manufacturer_Name="TE Connectivity", Datasheet Link=http://docs-europe.electrocomponents.com/webdocs/13d1/0900766b813d116f.pdf, Height=0.65mm, Manufacturer_Part_Number=CPF0805B560KE
R7: "Resistor", Manufacturer_Name=Bourns, Mouser Part Number=652-CR0805FX-1002ELF, Arrow Part Number=CR0805-FX-1002ELF, Arrow Price/Stock=https://www.arrow.com/en/products/cr0805-fx-1002elf/bourns?region=nac, Datasheet Link=https://www.bourns.com/pdfs/chpreztr.pdf, Height=0.6mm, Manufacturer_Part_Number=CR0805-FX-1002ELF, Mouser Price/Stock=https://www.mouser.co.uk/ProductDetail/Bourns/CR0805-FX-1002ELF?qs=tknLyCMIRbPr%252BDD0s0nG9g%3D%3D
R11: library part CR0805-JW-121ELF, "Resistor", Manufacturer_Name=Bourns, Mouser Part Number=652-CR0805JW-121ELF, Arrow Part Number=CR0805-JW-121ELF, Arrow Price/Stock=https://www.arrow.com/en/products/cr0805-jw-121elf/bourns?region=nac, Datasheet Link=https://www.bourns.com/pdfs/chpreztr.pdf, Height=0.6mm, Manufacturer_Part_Number=CR0805-JW-121ELF, Mouser Price/Stock=https://www.mouser.co.uk/ProductDetail/Bourns/CR0805-JW-121ELF?qs=wL7NMIHXUPnmcuStpLOKew%3D%3D
R12 R13: library part CR0805-FX-2002ELF, "Resistor", Manufacturer_Name=Bourns, Mouser Part Number=652-CR0805FX-2002ELF, Arrow Part Number=CR0805-FX-2002ELF, Arrow Price/Stock=https://www.arrow.com/en/products/cr0805-fx-2002elf/bourns?region=nac, Datasheet Link=https://www.bourns.com/pdfs/chpreztr.pdf, Height=0.6mm, Manufacturer_Part_Number=CR0805-FX-2002ELF, Mouser Price/Stock=https://www.mouser.co.uk/ProductDetail/Bourns/CR0805-FX-2002ELF?qs=mEbcl8R%252Bl%252Bv8rqM1zQjjRA%3D%3D
R14 R15 R16 R17 R20 R23 R24 R25 R34: library part CR0805-FX-1002ELF, "Resistor", Manufacturer_Name=Bourns, Mouser Part Number=652-CR0805FX-1002ELF, Arrow Part Number=CR0805-FX-1002ELF, Arrow Price/Stock=https://www.arrow.com/en/products/cr0805-fx-1002elf/bourns?region=nac, Datasheet Link=https://www.bourns.com/pdfs/chpreztr.pdf, Height=0.6mm, Manufacturer_Part_Number=CR0805-FX-1002ELF, Mouser Price/Stock=https://www.mouser.co.uk/ProductDetail/Bourns/CR0805-FX-1002ELF?qs=tknLyCMIRbPr%252BDD0s0nG9g%3D%3D
R18: library part CR0603-FX-1004ELF, "Resistor", Manufacturer_Name=Bourns, Mouser Part Number=652-CR0603FX-1004ELF, Arrow Part Number=CR0603-FX-1004ELF, Arrow Price/Stock=https://www.arrow.com/en/products/cr0603-fx-1004elf/bourns?region=nac, Datasheet Link=https://www.bourns.com/pdfs/chpreztr.pdf, Height=0.55mm, Manufacturer_Part_Number=CR0603-FX-1004ELF, Mouser Price/Stock=https://www.mouser.co.uk/ProductDetail/Bourns/CR0603-FX-1004ELF?qs=e7cxVwPieuqVG4NBrfqH%252BA%3D%3D
R19: library part RC0402JR-071KL, "Resistor", Manufacturer_Name=KEMET, Mouser Part Number=603-RC0402JR-071KL, Arrow Part Number=RC0402JR-071KL, Arrow Price/Stock=https://www.arrow.com/en/products/rc0402jr-071kl/yageo?region=europe, Datasheet Link=http://www.yageo.com/documents/recent/PYu-RC0402_51_RoHS_L_6_r.pdf, Height=0.4mm, Manufacturer_Part_Number=RC0402JR-071KL, Mouser Price/Stock=https://www.mouser.co.uk/ProductDetail/YAGEO/RC0402JR-071KL?qs=uM1JSSdPjOCtzNbByOhClA%3D%3D
R21 R27 R33: library part RC0603FR-074K7L, "Resistor", Manufacturer_Name=KEMET, Mouser Part Number=603-RC0603FR-074K7L, Arrow Part Number=RC0603FR-074K7L, Arrow Price/Stock=https://www.arrow.com/en/products/rc0603fr-074k7l/yageo?region=europe, Datasheet Link=http://www.yageo.com/documents/recent/PYu-RC0603_51_RoHS_L_v5.pdf, Height=0.55mm, Manufacturer_Part_Number=RC0603FR-074K7L, Mouser Price/Stock=https://www.mouser.co.uk/ProductDetail/YAGEO/RC0603FR-074K7L?qs=gt6vzsuosg37y0l7Vt36bQ%3D%3D
R22 R31: library part CPF0603B47K5E1, "Resistor", Manufacturer_Name="TE Connectivity", Mouser Part Number=279-CPF0603B47K5E1, Datasheet Link=http://www.farnell.com/datasheets/1786775.pdf, Height=0.55mm, Manufacturer_Part_Number=CPF0603B47K5E1, Mouser Price/Stock=https://www.mouser.co.uk/ProductDetail/TE-Connectivity-Holsworthy/CPF0603B47K5E1?qs=HLeXuo0aL2pkn%2F2uGrcY6w%3D%3D
R26 R29 R30: library part RC0603FR-0722RL, "Resistor", Manufacturer_Name=KEMET, Mouser Part Number=603-RC0603FR-0722RL, Datasheet Link=http://www.yageo.com/documents/recent/PYu-RC0603_51_RoHS_L_v5.pdf, Height=0.55mm, Manufacturer_Part_Number=RC0603FR-0722RL, Mouser Price/Stock=https://www.mouser.co.uk/ProductDetail/YAGEO/RC0603FR-0722RL?qs=diQw95jMAeMOsxb8bne7fg%3D%3D
R28: library part ACPP0805_1K_B, "Resistor", Manufacturer_Name=Ohmite, Manufacturer_Part_Number="ACPP0805 1K B", Mouser Part Number=284-ACPP08051KB, Datasheet Link=http://www.ohmite.com/assets/docs/acl_acpp.pdf?r=false, Height=0.65mm, Mouser Price/Stock=https://www.mouser.co.uk/ProductDetail/Ohmite/ACPP0805-1K-B?qs=Zd7iEDjwU0pWc8Q5DTRspw%3D%3D
S1: "Switch", Arrow Part Number="PTS815 SJK 250 SMTR LFS", Manufacturer_Name="C & K COMPONENTS", Mouser Part Number=611-PTS815SJK250SMTR, Arrow Price/Stock=https://www.arrow.com/en/products/pts815-sjk-250-smtr-lfs/ck, Datasheet Link=https://www.mouser.com/datasheet/2/60/pts815-1535658.pdf, Height=2mm, Manufacturer_Part_Number="PTS815 SJK 250 SMTR LFS", Mouser Price/Stock=https://www.mouser.co.uk/ProductDetail/CK/PTS815-SJK-250-SMTR-LFS?qs=ahcBuItHZ3yETpGYMHf%2FgQ%3D%3D
U2 U3: "Pre-Biased Bipolar Transistor (BJT) NPN - Pre-Biased 50V 100mA 246mW Surface Mount SOT-23-3 (TO-236)", Package="SOT-23-3 ON Semiconductor", Check_prices=https://www.snapeda.com/parts/MMUN2233LT1/Onsemi/view-part/?ref=eda, MF="ON Semiconductor", MP=MMUN2233LT1, SnapEDA_Link=https://www.snapeda.com/parts/MMUN2233LT1/Onsemi/view-part/?ref=snap
Y1: library part 830003151, "Crystal or Oscillator", Manufacturer_Name="Wurth Elektronik", Mouser Part Number=710-830003151, Datasheet Link=https://www.we-online.com/catalog/datasheet/830003151.pdf, Height=4.3mm, Manufacturer_Part_Number=830003151, Mouser Price/Stock=https://www.mouser.co.uk/ProductDetail/Wurth-Elektronik/830003151?qs=2WXlatMagcHisY7XHApyYg%3D%3D
Y2: library part ABS06-127-32.768KHZ-T, "Crystal or Oscillator", Manufacturer_Name=ABRACON, Mouser Part Number=815-ABS0612732.768KT, Arrow Part Number=ABS06-127-32.768KHZ-T, Arrow Price/Stock=https://www.arrow.com/en/products/abs06-127-32.768khz-t/abracon?region=nac, Datasheet Link=https://abracon.com/Resonators/ABS06.pdf, Height=0.6mm, Manufacturer_Part_Number=ABS06-127-32.768KHZ-T, Mouser Price/Stock=https://www.mouser.co.uk/ProductDetail/ABRACON/ABS06-127-32.768KHZ-T?qs=wUXugUrL1qxIf8zF6vMtIQ%3D%3D

## Free pads (board coordinates)
  round 7.2 hole 4: 3(83.82,58.42) 4(83.82,5.08) 5(5.08,58.42) 6(5.08,5.08)
  round 1.524 hole 0.762: 21(80.01,25.4) 22(82.55,25.4) 23(85.09,25.4) 24(85.09,22.86) 25(82.55,22.86) 26(80.01,22.86) 29(80.01,20.32) 30(82.55,20.32) 31(85.09,20.32) 32(85.09,17.78) 33(82.55,17.78) 34(80.01,17.78) 35(85.09,15.24) 36(82.55,15.24) 37(80.01,15.24) 38(80.01,12.7) 39(82.55,12.7) 40(85.09,12.7) 41(85.09,10.16) 42(82.55,10.16) 43(80.01,10.16) 78(50.8,3.81) 79(50.8,6.35) 80(51.054,8.89) 81(51.054,11.43) 82(53.34,3.81) 83(53.34,6.35) 84(53.34,8.89) 85(53.34,11.43) 87(26.67,21.336) 88(29.21,21.336) 89(31.75,21.336) 90(31.75,19.304) 91(26.67,19.05) 92(29.21,19.05) 93(31.75,17.272) 94(29.21,17.272) 95(26.67,17.272) 97(46.99,24.13) 98(46.99,21.59) 99(46.99,19.05) 100(46.99,16.51)

## Via types
v1: diameter 0.5, hole 0.254, Top Layer to Bottom Layer, tented both sides, 47 vias
v2: diameter 1.27, hole 0.711, Top Layer to Bottom Layer, tented both sides, 18 vias

## Nets (pads, with @x,y where several pads share a name; then routed paths per layer and width w, separated by ;. In a path a pad name is that pad's centre, name@x,y a point inside that pad or via, vN(x,y) a via of type N, cw(c..) or ccw(c..) an arc to the next point about the centre after c; other vN are vias at no path point)
4V: C12.1 C13.2 C14.2 C15.2 C16.2 C17.2 C18.2 L3.2 LED3.2 R6.2 U1.42 U1.43 | length 36.5
  Top Layer w0.254: C15.2@47.173,43.019 C15.2 ; C16.2 C16.2@48.214,44.241 ; LED3.2 52.292,22.653 52.531,22.653 v1(52.578,22.606) ; v1(55.88,7.62) 56.388,7.112 R6.2 57.724,4.976 C13.2 ; C17.2 63.292,12.4 63.246,12.446 v1(65.024,12.446) ; C12.1@65.532,18.796 C12.1
  Bottom Layer w0.254: v1(52.578,22.606) 52.58,22.604 67.408,22.604 67.507,22.505 v1(67.573,22.505) ; v1(55.88,7.62) 55.88,10.16 58.166,12.446 v1(65.024,12.446)
12V: C1.1 D2.1 IC1.1 J1.4 | length 22.6
  Top Layer w0.508: 13.332,14.042 D2.1@13.332,15.741
  Top Layer w1.02: J1.4 J1.4@8.846,13.964
  Top Layer w1.274: J1.4@8.783,14.042 13.332,14.042 17.354,14.042 17.767,13.629 C1.1 ; C1.1@17.512,13.128 22.94,13.128 25.545,10.523 IC1.1
+5: C2.1 C6.2 C19.2 IC1.4 IC2.4 IC3.4 IC5.8 L1.2 R1.2 R3.2 R9.2 R13.2 | length 148.5
  Top Layer w0.254: R3.2 32.004,35.24 32.004,33.274 31.496,32.766 31.496,29.613 31.964,29.145 32.717,29.145 IC2.4@32.782,29.08 ; 46.742,14.202 46.742,14.703 ; 50.851,14.703 51.232,15.085 51.232,16.558 R1.2 ; IC3.4@63.727,10.351 64.706,10.351 64.855,10.202 64.855,8.176 64.346,7.667 R9.2
  Top Layer w0.508: IC5.8 3.558,37.467 3.487,37.396 v2(3.487,35.864) 3.487,34.105 4.318,33.274 5.588,33.274 5.536,33.222 R13.2 ; IC1.4 30.645,11.595 32.445,13.395 41.532,13.395 42.692,14.555 C2.1 42.692,21.421 39.417,24.696 33.167,24.696 32.805,25.059 32.805,29.085 IC2.4 ; L1.2 L1.2@41.694,13.232
  Top Layer w0.762: C19.2 58.574,13.298 58.574,11.782 59.367,10.99 61.84,10.99 62.481,10.348 IC3.4
  Top Layer w1.016: L1.2@41.532,13.395 41.694,13.232 41.91,13.016 41.91,10.16 41.865,10.115 v2(41.865,9.864)
  Top Layer w1.27: L1.2@41.694,13.232 45.773,13.232 46.742,14.202 47.244,14.703 50.851,14.703 57.772,14.703 58.485,13.99 C19.2
  Bottom Layer w0.508: v2(3.487,35.864) 8.84,35.864 11.938,32.766 11.938,17.272 15.836,13.374 40.474,13.374 41.865,11.983 v2(41.865,9.864)
A: IC5.6 J1.2 R11.2 R13.1 | length 26.7
  Top Layer w0.508: IC5.6 3.6,40.005 5.715,40.005 6.128,39.592 6.128,37.56 7.156,36.532 7.156,35.77 R11.2 R13.1 10.047,33.222 11.555,31.713 11.555,22.731 10.408,21.584 J1.2
B: IC5.7 J1.1 R11.1 R12.2 | length 23.6
  Top Layer w0.254: IC5.7 IC5.7@3.6,38.735 ; R11.1@5.093,36.158 5.22,36.031 5.466,35.785 R11.1
  Top Layer w0.508: R12.2 R12.2@3.418,31.542 ; IC5.7 3.594,38.734 2.545,38.734 1.832,38.021 1.832,33.766 3.418,32.18 R12.2@3.418,31.542 ; IC5.7@3.6,38.735 4.997,38.735 5.22,38.512 R11.1@5.22,36.031 ; J1.1@8.694,25.404 8.694,27.764 5.284,31.174 3.786,31.174 R12.2@3.418,31.542
BOOT0: IC4.44 R20.2 | length 2.5
  Top Layer w0.254: IC4.44 20.701,47.094 20.701,44.617 R20.2
CLOCK: J5.3 R24.2 R32.2 | length 51.4
  Top Layer w0.254: J5.3 36.214,59.544 36.214,58.44 ccw(c36.468,58.441) 36.215,58.427 36.22,58.336 cw(c35.966,58.321) 36.214,58.266 36.214,57.859 36.289,57.784 36.928,57.145 43.566,57.145 43.857,56.854 43.857,38.998 48.019,34.836 55.08,34.836 56.134,33.782 R32.2 R24.2
COUNT: C33.1 IC4.42 R24.1 | length 49.7
  Top Layer w0.254: IC4.42 19.737,47.084 19.737,46.376 19.742,46.372 19.742,43.259 19.944,43.057 19.944,42.879 v1(19.991,42.831) ; v1(53.029,24.669) 54.203,24.669 54.164,24.63 C33.1
  Bottom Layer w0.254: v1(19.991,42.831) 20.038,42.784 20.216,42.784 29.472,33.528 42.367,33.528 51.226,24.669 v1(53.029,24.669)
GND: C1.2 C2.2 C3.1 C5.1 C6.1 C7.2 C8.1 C9.1 C10.1 C11.1 C12.2 C14.1 C15.1 C16.1 C17.1 C18.1 C19.1 C20.1 C21.1 C22.1 C23.1 C24.1 C25.1 C26.1 C27.1 C28.1 C30.1 C31.1 C32.1 D1.2 D2.2 IC1.3 IC1.5 IC1.6 IC2.2 IC3.2 IC4.8 IC4.23 IC4.35 IC4.47 IC5.5 IC6.2 J1.3 J2.1 J3.MP1 J3.MP2 J3.MP3 J3.MP4 J4.2 J4.3 J5.4 LED1.1 LED2.1 pad.21 pad.22 pad.23 pad.24 pad.25 pad.26 pad.29 pad.30 pad.31 pad.32 pad.33 pad.34 pad.35 pad.36 pad.37 pad.38 pad.39 pad.40 pad.41 pad.42 pad.43 pad.78 pad.79 pad.80 pad.81 pad.82 pad.83 pad.84 pad.85 pad.87 pad.88 pad.89 pad.90 pad.91 pad.92 pad.93 pad.94 pad.95 pad.97 pad.98 pad.99 pad.100 Q1.2 Q2.2 R2.1 R4.1 R8.1 R10.1 R12.1 R15.1 R20.1 R22.1 R23.1 R31.1 R32.1 S1.3 U1.27 U1.34 U1.36 U1.37 U1.40 U1.41 | length 38.5
  Top Layer w0.254: IC5.5@3.554,41.277 IC5.5@3.598,41.233 ; IC5.5 IC5.5@3.598,41.233 ; IC5.5@3.607,41.224 IC5.5@3.598,41.233 ; C9.1 13.863,48.105 13.863,48.716 14.183,49.035 14.388,49.035 v1(14.435,49.082) 14.441,49.089 15.72,49.089 IC4.35 ; C8.1 17.628,57.404 cw(c17.628,57.302) v1(17.729,57.302) 17.722,57.295 17.722,55.591 IC4.23 ; C1.2 C1.2@18.076,3.718 ; IC4.47 22.22,47.102 22.22,45.809 ; C10.1 22.22,44.949 22.22,45.809 ; v1(22.864,45.845) 22.828,45.809 22.22,45.809 ; IC4.8 25.931,52.095 ; v1(25.936,52.726) 25.931,52.721 25.931,52.095 ; C20.1 29.209,42.849 C28.1 ; C11.1 26.887,52.095 25.931,52.095 ; IC1.6@27.94,18.245 IC1.6 ; U1.40 U1.40@51.627,47.228 ; U1.37 50.727,50.579 50.572,50.734 50.572,51.473 U1.36 ; C32.1 76.886,32.087 76.905,32.106 77.807,32.106 78.704,33.003 79.408,33.003 IC6.2@79.447,33.041 ; J3.MP3 83.412,40.232 83.538,40.358 v1(83.538,41.158)
  Top Layer w0.508: R12.1 3.68,29.379 4.66,29.379 5.64,28.399 5.64,19.252 7.118,17.774 J1.3 ; C16.1@46.61,44.446 C16.1
  Bottom Layer w0.254: v1@14.388,49.035 v1(14.435,49.082)
  other v1: 61.533,52.844
  other v2: 10.668,2.54 10.668,4.064 10.668,6.096 10.668,8.128 8.442,9.985 10.668,10.16 76.544,30.161 49.022,58.166 51.054,58.166 54.507,58.166 56.382,58.175 49.022,59.69 56.382,59.894 49.022,61.214 56.363,61.443
LOSC_IN: C20.2 IC4.3 Y2.2 | length 8
  Top Layer w0.254: IC4.3 24.208,49.59 26.61,49.59 26.858,49.342 26.858,48.485 Y2.2 ; C20.2 26.595,44.797 26.595,45.305 26.963,45.672 Y2.2@26.963,48.38
LOSC_OUT: C28.2 IC4.4 Y2.1 | length 9.8
  Top Layer w0.254: IC4.4 24.224,50.073 27.722,50.073 28.383,49.412 Y2.1 28.402,48.391 28.402,45.877 29.121,45.157 29.121,44.539 C28.2@29.197,44.463
M_RX: IC4.31 IC5.1 R14.1 | length 20.9
  Top Layer w0.254: IC5.1 11.127,37.467 12.852,39.192 12.852,50.241 13.701,51.09 15.721,51.09 IC4.31
  Top Layer w0.381: IC5.1 9.144,37.421 R14.1
M_TX: IC4.30 IC5.4 R17.1 | length 25.7
  Top Layer w0.254: v1(7.819,41.275) 7.925,41.275 7.927,41.277 IC5.4 ; v1(12.243,48.895) 12.243,50.673 13.154,51.584 15.716,51.584 IC4.30
  Top Layer w0.381: IC5.4 9.269,41.277 9.398,41.148 9.527,41.277 10.543,41.277 10.922,41.656 10.922,45.466 10.414,45.974 R17.1
  Bottom Layer w0.254: v1(7.819,41.275) 7.819,41.321 7.823,41.326 7.827,41.322 7.932,41.322 7.936,41.326 10.592,41.326 10.922,41.656 10.922,45.466 12.243,46.787 v1(12.243,48.895)
NetC4_1: C4.1 IC2.5 R4.2 R5.1 | length 8.2
  Top Layer w0.254: IC2.5 32.84,31.037 32.84,31.824 33.24,32.224 R5.1@35.04,32.224 ; R4.2 35.021,30.195 35.052,30.226 35.052,32.212 R5.1@35.04,32.224 ; C4.1 35.526,34.794 35.526,33.917 35.028,33.419 R5.1 R5.1@35.04,32.224
NetC13_1: C13.1 IC3.5 R6.1 R8.2 | length 9.3
  Top Layer w0.254: C13.1 59.474,6.962 R6.1 ; R8.2 59.624,7.312 R6.1 ; IC3.5 62.042,8.448 60.706,7.112 R6.1
NetC30_2: C30.2 IC6.4 J3.C3 R30.2 | length 36
  Top Layer w0.254: R30.2 73.12,32.421 73.17,32.37 v1(74.074,32.37) ; J3.C3 78.994,47.378 78.994,49.381 79.143,49.53 82.042,49.53 84.582,46.99 84.582,36.946 83.059,35.423 C30.2 ; IC6.4 82.404,32.383 ; v1(81.914,31.503) 81.931,31.52 82.281,31.52 82.43,31.669 82.43,34.765 82.579,34.913 C30.2
  Bottom Layer w0.254: v1(74.074,32.37) 80.426,32.37 81.293,31.503 v1(81.914,31.503)
NetC31_2: C31.2 IC6.3 J3.C7 R25.1 R29.2 | length 40.2
  Top Layer w0.254: v1(72.136,33.782) 72.644,34.29 73.914,34.29 R25.1 ; v1(73.152,27.432) 73.152,28.451 R29.2 78.011,28.484 80.05,30.523 ; J3.C7 81.816,48.232 82.296,47.752 82.296,39.048 80.801,37.554 80.801,34.568 80.571,34.337 80.571,32.752 80.385,32.566 80.385,32.548 80.236,32.4 79.47,32.4 IC6.3 79.454,31.118 80.049,30.523 ; C31.2 80.049,30.523
  Bottom Layer w0.254: v1(72.136,33.782) 72.136,27.835 72.539,27.432 v1(73.152,27.432)
NetC32_2: C32.2 IC6.1 J3.C2 R26.2 | length 22.6
  Top Layer w0.254: R26.2 73.179,30.48 73.914,30.48 76.2,32.766 C32.2 76.893,32.773 77.477,32.773 78.387,33.683 79.466,33.683 79.539,33.756 79.539,37.561 81.641,39.664 81.641,44.851 81.026,45.466 79.084,45.466 J3.C2
NetD1_1: D1.1 IC1.2 L1.1 | length 18
  Top Layer w1.274: IC1.2 27.245,6.047 28.974,4.318 32.766,4.318 33.325,3.759 41.429,3.759 L1.1
NetIC2_1: IC2.1 R2.2 R3.1 | length 6.5
  Top Layer w0.254: R2.2 27.959,35.325 30.019,35.325 30.196,35.148 IC2.1
NetIC2_3: IC2.3 L2.1 | length 5.6
  Top Layer w0.254: L2.1 26.924,29.774 L2.1@27.422,29.276
  Top Layer w0.508: L2.1 28.565,29.093 IC2.3
NetIC3_1: IC3.1 R9.1 R10.2 | length 7.8
  Top Layer w0.254: R10.2 64.632,4.622 64.632,5.27 64.863,5.5 66.069,5.5 66.218,5.649 66.218,6.61 66.585,6.977 67.401,6.977 67.55,7.126 67.55,8.299 67.401,8.448 IC3.1
NetIC3_3: IC3.3 L3.1 | length 4.6
  Top Layer w0.762: IC3.3 66.403,10.427 70.186,10.427 70.445,10.168 L3.1@70.445,9.852
NetLED1_2: LED1.2 R1.1 | length 3.7
  Top Layer w0.254: R1.1 49.256,16.634 49.256,20.048 LED1.2
NetLED2_2: LED2.2 R19.1 | length 2.8
  Top Layer w0.254: LED2.2 35.093,25.908 36.813,25.908 37.084,26.179 R19.1
NetLED3_1: LED3.1 R28.2 | length 3.8
  Top Layer w0.254: LED3.1 49.451,23.994 49.451,24.683 50.02,25.251 50.931,25.251 51.203,25.523 51.203,26.366 R28.2@51.28,26.443
NETLIGHT: R27.1 U1.16 | length 23.6
  Top Layer w0.508: R27.1 52.858,33.695 54.955,33.695 v1(54.956,33.694) ; v1@64.435,45.084 66.834,45.084 66.854,45.064 67.89,45.064 U1.16
  Bottom Layer w0.508: v1(54.956,33.694) 54.958,33.692 56.937,33.692 60.331,37.086 60.331,43.571 61.855,45.095 v1(64.425,45.095)
NetQ1_1: Q1.1 R21.2 R22.2 | length 6.1
  Top Layer w0.254: R22.2@41.91,31.75 R22.2@42.135,31.525 ; R22.2 R22.2@42.135,31.525 ; R21.2@45.55,33.598 45.55,31.467 45.401,31.318 44.219,31.318 Q1.1 42.232,31.428 R22.2@42.135,31.525
NetQ2_1: Q2.1 R27.2 R31.2 | length 4.1
  Top Layer w0.254: Q2.1 49.53,31.43 49.53,33.621 R31.2 R27.2
NetQ2_3: Q2.3 R28.1 | length 4.9
  Top Layer w0.254: R28.1 49.396,26.655 49.769,27.028 49.824,27.028 51.547,28.751 51.547,30.392 Q2.3
OSC_IN: C26.2 IC4.5 R18.2 Y1.1 | length 22.9
  Top Layer w0.254: IC4.5 24.208,50.59 30.804,50.59 31.411,49.982 C26.2@31.411,48.801 ; C26.2 C26.2@31.411,48.801 ; R18.2@33.929,50.216 33.929,44.862 35.44,43.35 Y1.1 ; R18.2 33.765,50.119 33.24,50.119 32.133,49.012 31.622,49.012 C26.2@31.411,48.801
OSC_OUT: C27.2 IC4.6 R18.1 Y1.2 | length 19.8
  Top Layer w0.254: IC4.6@24.211,51.087 30.77,51.087 31.321,51.638 31.321,52.38 C27.2 ; C27.2@31.381,52.46 31.483,52.562 32.479,52.562 33.24,51.801 33.632,51.801 33.655,51.778 33.702,51.778 33.825,51.778 R18.1 ; R18.1@33.655,51.9 33.702,51.9 34.025,52.223 34.025,53.329 35.052,54.356 39.04,54.356 39.04,52.89 Y1.2
PWRKEY: Q1.3 U1.7 | length 17.6
  Top Layer w0.254: v1(58.776,37.795) 59.241,38.261 59.241,39.492 U1.7
  Top Layer w0.508: Q1.3 46.242,30.44 v1(47.672,30.44)
  Bottom Layer w0.508: v1@47.684,30.428 50.14,30.428 57.507,37.795 v1(58.776,37.795)
PWRKEY_FMCU: IC4.27 R21.1 | length 36.7
  Top Layer w0.254: IC4.27 15.736,53.086 16.909,53.086 17.553,52.441 21.35,52.441 v1(21.357,52.448) ; v1(42.672,34.798) 42.719,34.751 43.591,34.751 43.934,34.408 R21.1
  Bottom Layer w0.254: v1(21.357,52.448) 39.007,34.798 v1(42.672,34.798)
RESET: C25.2 IC4.7 R7.1 S1.1 | length 23.7
  Top Layer w0.254: R7.1 4.956,51.439 7.447,51.439 7.447,51.83 7.62,52.003 v1(7.62,52.07) ; C25.2@7.444,50.333 7.444,51.439 ; v1(17.432,51.596) 17.435,51.593 24.179,51.593 24.181,51.595 IC4.7
  Top Layer w0.508: S1.1 4.727,49.082 4.727,51.21 R7.1
  Bottom Layer w0.254: v1(7.62,52.07) 16.946,52.07 v1@17.42,51.596
SIM_ANT: J4.1 U1.35 | length 4.1
  Top Layer w0.8: U1.35 J4.1@52.727,58.99
SIM_CLK: R30.1 U1.13 | length 11
  Top Layer w0.254: U1.13 65.788,39.439 65.788,38.679 68.921,35.546 68.921,32.557 69.07,32.408 R30.1
SIM_DATA: R29.1 U1.11 | length 15.3
  Top Layer w0.254: U1.11 63.546,39.397 63.546,38.621 67.285,34.881 67.285,31.351 70.152,28.484 R29.1
SIM_GND: C29.1 J3.C5 J3.G1 J3.G2 U1.10 | length 54.3
  Top Layer w0.254: U1.10 62.668,39.619 62.668,41.561 62.817,41.71 66.494,41.71 69.842,38.362 69.842,37.303 C29.1 69.841,36.331 70.866,35.306 75.692,35.306 80.946,40.56 80.946,43.786 J3.C5 78.05,44.632 77.47,45.212 77.47,49.53 78.232,50.292 82.296,50.292 84.074,48.514 85.742,48.514 J3.G2 85.834,48.532 85.852,48.514 85.852,41.814 J3.G1
SIM_RESET: IC4.15 U1.23 | length 51.1
  Top Layer w0.254: IC4.15 v1(21.715,56.966) ; v1(47.037,55.472) 49.404,55.472 52.906,51.971 65.18,51.971 65.927,52.717 U1.23
  Bottom Layer w0.254: v1(21.715,56.966) 21.715,57.351 22.121,57.758 28.17,57.758 30.556,55.372 38.713,55.372 38.813,55.472 v1(47.037,55.472)
SIM_RST: R26.1 U1.12 | length 13.2
  Top Layer w0.254: U1.12 64.667,39.418 64.667,38.649 68.123,35.193 68.123,31.826 69.529,30.42 70.608,30.42 ; 70.609,30.421 R26.1
SIM_RX: IC4.12 R34.1 U1.17 U3.3 | length 88.7
  Top Layer w0.254: IC4.12 24.206,54.099 25.651,54.099 v1(25.654,54.102) ; v1(61.976,23.876) 61.976,26.372 U3.3 63.062,26.416 64.012,25.466 R34.1 ; v1(64.463,47.538) 64.51,47.491 65.084,47.491 66.447,46.128 U1.17
  Bottom Layer w0.254: v1(25.654,54.102) 28.194,54.102 36.576,45.72 61.305,45.72 63.105,47.52 64.445,47.52 v1(64.463,47.538) ; v1(61.976,23.876) 58.928,23.876 58.166,24.638 58.166,29.464 59.182,30.48 64.77,30.48 66.512,32.222 66.512,46.187 65.284,47.416 65.185,47.416 65.105,47.496 ; v1@64.463,47.52 64.84,47.52 64.85,47.51 65.024,47.51 65.071,47.463
SIM_RX_EXT: J5.2 U3.2 | length 51.2
  Top Layer w0.254: J5.2 38.859,59.439 38.859,58.321 39.267,57.913 43.916,57.913 44.704,57.125 44.704,39.37 48.505,35.569 56.125,35.569 57.403,34.291 57.403,26.81 58.746,25.466 59.607,25.466 U3.2 59.9,25.444 U3.2@59.607,25.444
SIM_TX: IC4.13 U1.18 U2.2 | length 83.3
  Top Layer w0.254: IC4.13 22.724,55.593 22.724,56.699 23.006,56.981 v1(26.03,56.981) ; U2.2 59.944,29.994 v1(59.944,28.702) ; v1(64.663,48.923) 65.072,48.923 66.682,47.313 67.841,47.313 U1.18
  Bottom Layer w0.254: v1(26.03,56.981) 27.703,56.981 37.694,46.99 61.145,46.99 63.082,48.927 64.659,48.927 v1(64.663,48.923) ; v1(59.944,28.702) 65.024,28.702 68.58,32.258 68.58,47.498 67.151,48.927 64.903,48.927 v1@64.663,48.927
SIM_TX_EXT: J5.1 R33.1 U2.3 | length 48.3
  Top Layer w0.254: J5.1 43.688,59.69 45.466,57.912 45.466,39.878 49.196,36.148 60.118,36.148 62.02,34.246 U2.3 ; U2.3@62.022,30.988 62.022,30.217 62.98,29.259 63.933,29.259 R33.1
SIM_VDD: C29.2 J3.C1 R25.2 U1.14 | length 21.1
  Top Layer w0.254: U1.14 67.959,42.86 70.114,42.86 ; C29.2 71.358,37.419 73.632,37.419 73.914,37.137 R25.2 ; C29.2@71.241,37.419 71.241,41.834 70.215,42.86 70.215,42.951 71.036,43.772 78.912,43.772 78.996,43.688 J3.C1
SIMDT: IC4.43 J3.CD1 | length 92.4